# EAGLE board Transceiver (EAGLE 5.06)
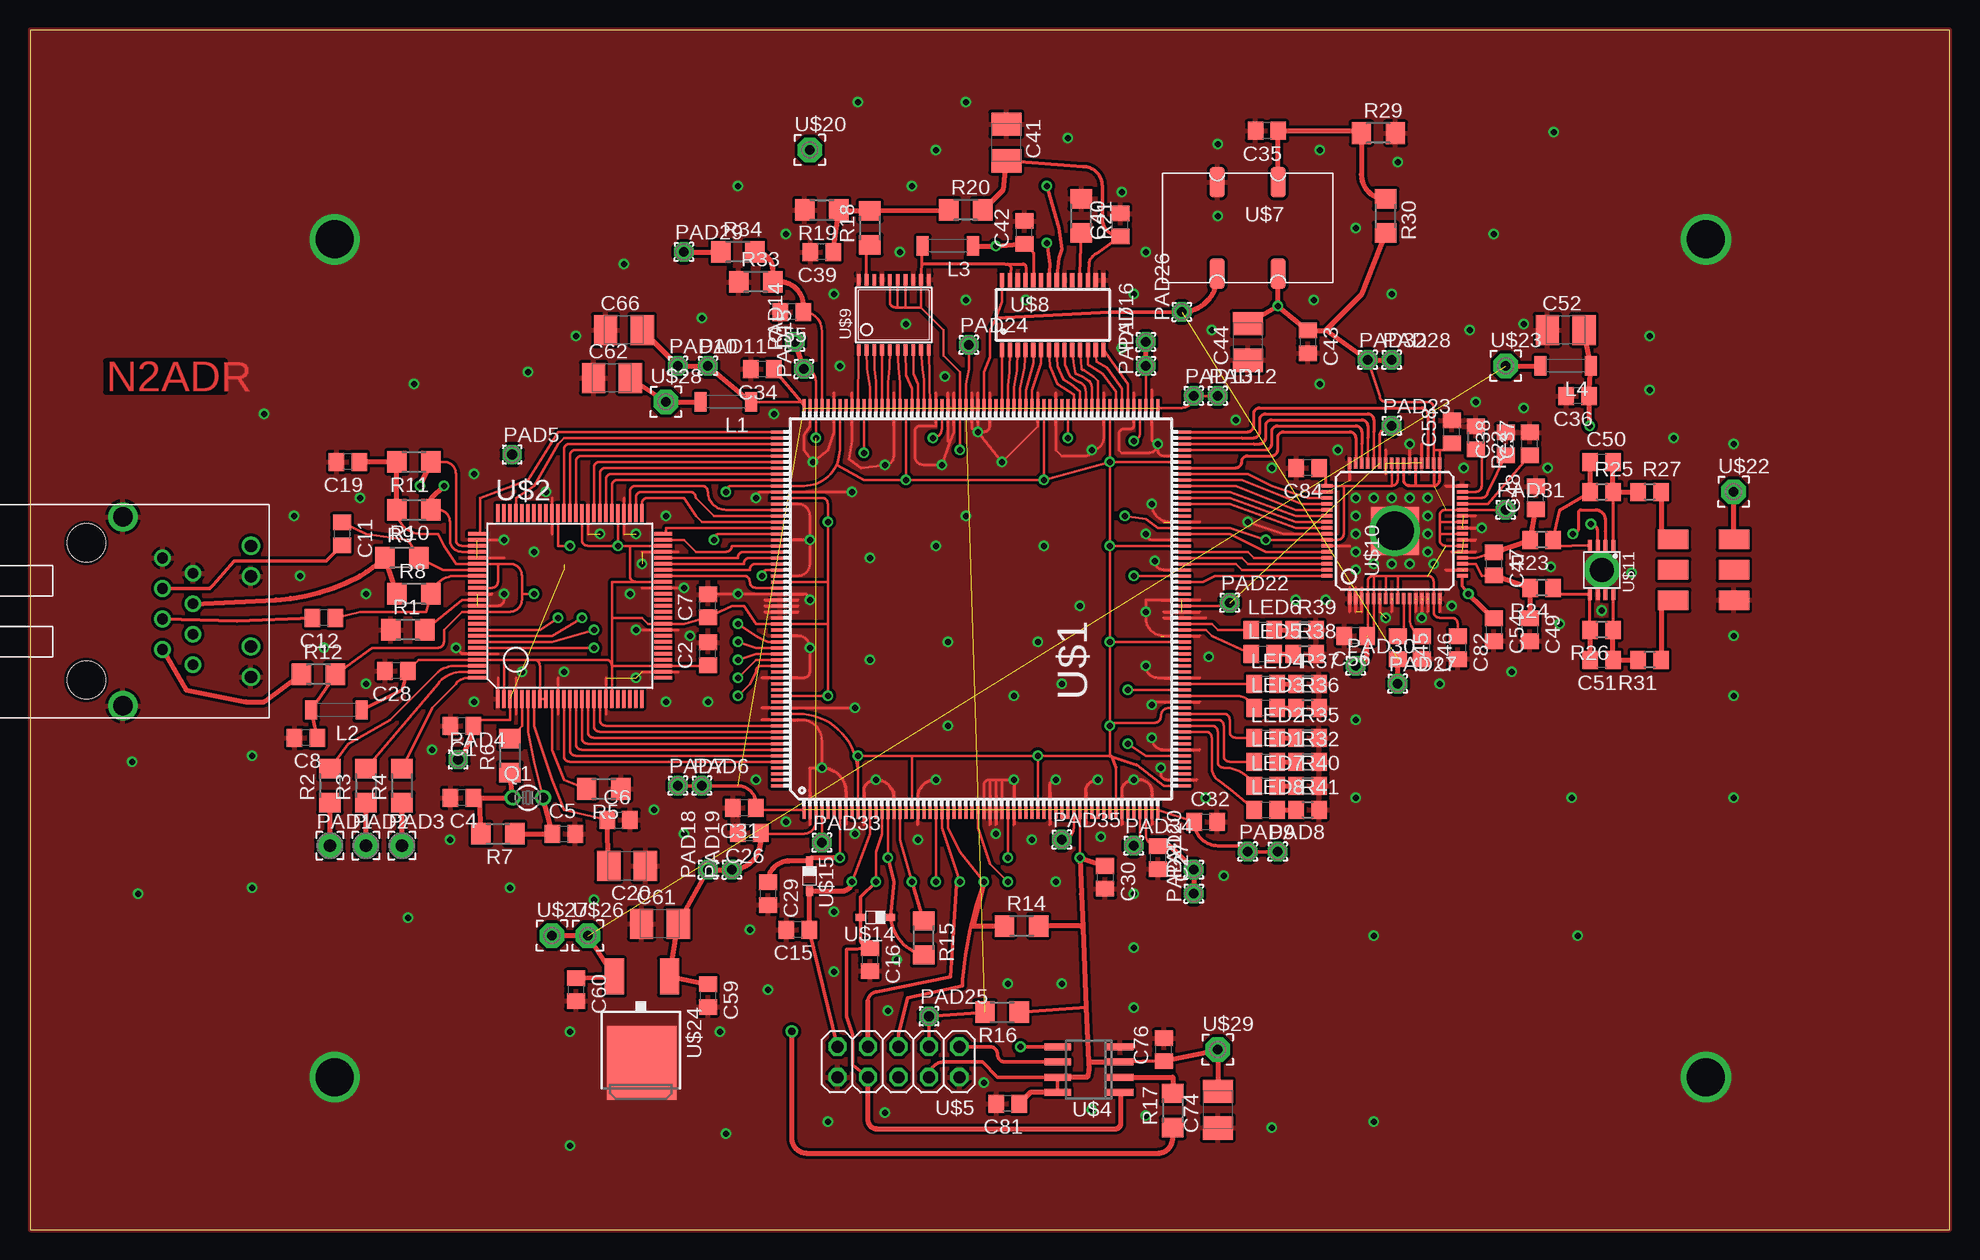
[diagram p0: board, top side]
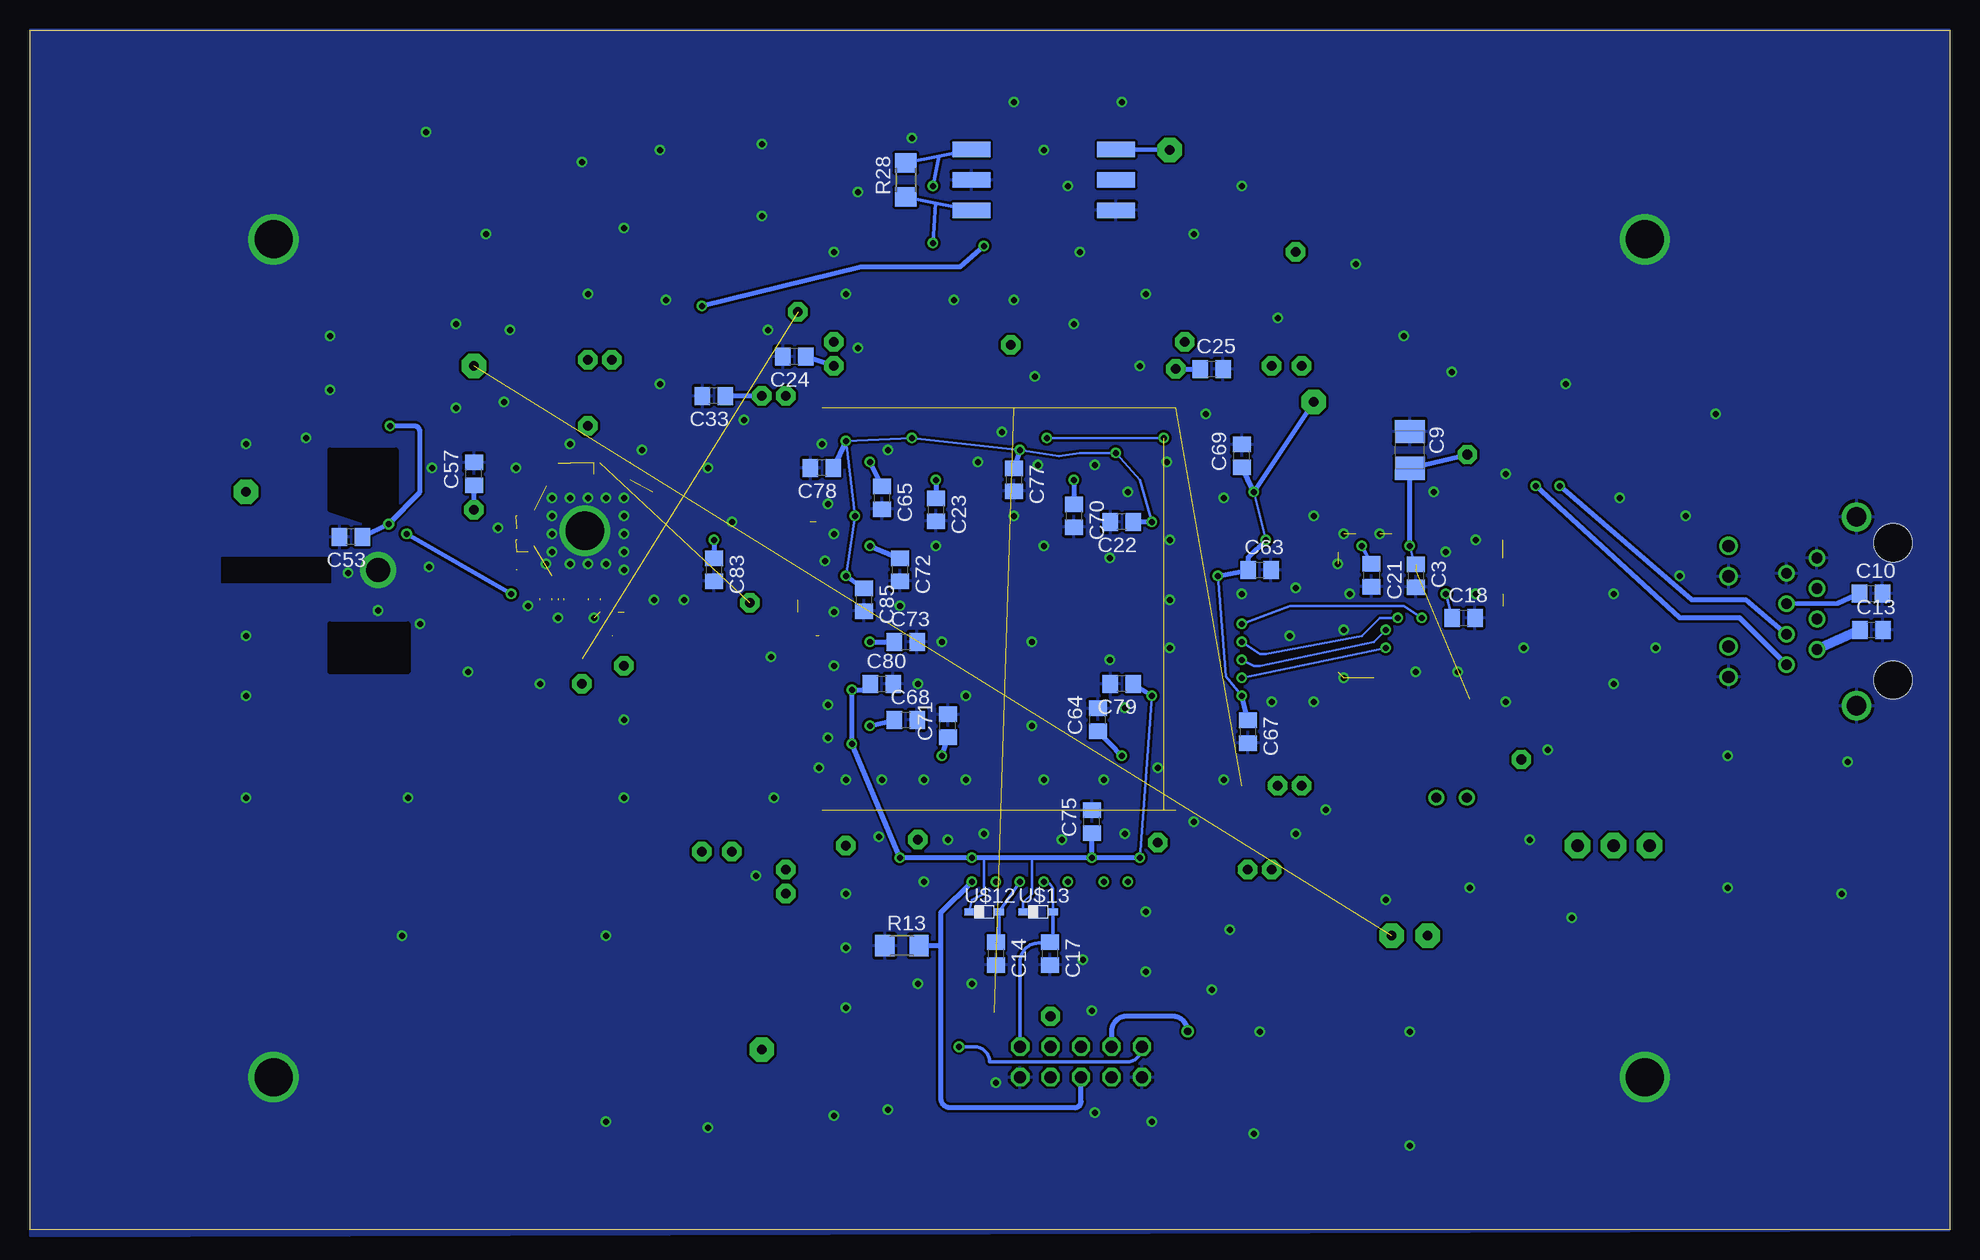
[diagram p1: board, bottom side, seen from below]

Size 160 x 100 mm. Coordinates in mm from the lower left corner, seen from the top.
Outline: 0,0 160,0 160,100 0,100 0,0
Copper layers (1*16): Top 0.035mm / dielectric 1.5mm / Bottom 0.035mm
Design rules "4pcb *": minimum track width 8mil, minimum drill 14mil, track to track 8mil, track to pad 8mil, pad to pad 6mil, via to via 8mil, smd to smd 0mil, copper to edge 0mil, drill to drill 8mil, minimum pad ring 10mil, minimum via ring 8mil, stop-mask expansion 4mil, vias tented up to drill 0mil, thermal gap 10mil
bRestrict: area 128.5,46.5 to 135,50.5; area 129.5,59 to 135,65; area 135,54 to 144,56

## Footprints (pad centres in the part's own frame; a part is rotated, then mirrored left to right if it is on the bottom)
MINI-CD637 = smd 1.651 x 2.54: P$1 -2.54,-2.54; P$2 0,-2.54; P$3 2.54,-2.54; P$4 2.54,2.54; P$5 0,2.54; P$6 -2.54,2.54
C0805 = smd 1.3 x 1.5: 1 -0.95,0; 2 0.95,0
B/3528-21R = smd 1.95 x 2.5: + 1.525,0; - -1.525,0
L4516C = smd 1 x 1.6: 1 -2.1,0; 2 2.1,0
2,15/1,0 = drill 1.016 pad 2.159 octagon: 1 0,0
1,6/0,8 = drill 0.813 pad 1.6 octagon: 1 0,0
TC26V = drill 0.813 round: 1 -1.27,0; 2 1.27,0
R1206 = smd 1.6 x 1.803: 1 -1.422,0; 2 1.422,0
R0805 = smd 1.3 x 1.5: 1 -0.95,0; 2 0.95,0
MINI-KK81 = smd 1.27 x 3.175: P$1 -2.54,6.032; P$2 0,6.032; P$3 2.54,6.032; P$4 2.54,-6.032; P$5 0,-6.032; P$6 -2.54,-6.032
PQFP240 = smd 1.5 x 0.25: 1 -16.75,14.75; 2 -16.75,14.25; 3 -16.75,13.75; 4 -16.75,13.25; 5 -16.75,12.75; 6 -16.75,12.25; 7 -16.75,11.75; 8 -16.75,11.25; 9 -16.75,10.75; 10 -16.75,10.25; 11 -16.75,9.75; 12 -16.75,9.25; 13 -16.75,8.75; 14 -16.75,8.25; 15 -16.75,7.75; 16 -16.75,7.25; 17 -16.75,6.75; 18 -16.75,6.25; 19 -16.75,5.75; 20 -16.75,5.25; 21 -16.75,4.75; 22 -16.75,4.25; 23 -16.75,3.75; 24 -16.75,3.25; 25 -16.75,2.75; 26 -16.75,2.25; 27 -16.75,1.75; 28 -16.75,1.25; 29 -16.75,0.75; 30 -16.75,0.25; 31 -16.75,-0.25; 32 -16.75,-0.75; 33 -16.75,-1.25; 34 -16.75,-1.75; 35 -16.75,-2.25; 36 -16.75,-2.75; 37 -16.75,-3.25; 38 -16.75,-3.75; 39 -16.75,-4.25; 40 -16.75,-4.75; 41 -16.75,-5.25; 42 -16.75,-5.75; 43 -16.75,-6.25; 44 -16.75,-6.75; 45 -16.75,-7.25; 46 -16.75,-7.75; 47 -16.75,-8.25; 48 -16.75,-8.75; 49 -16.75,-9.25; 50 -16.75,-9.75; 51 -16.75,-10.25; 52 -16.75,-10.75; 53 -16.75,-11.25; 54 -16.75,-11.75; 55 -16.75,-12.25; 56 -16.75,-12.75; 57 -16.75,-13.25; 58 -16.75,-13.75; 59 -16.75,-14.25; 60 -16.75,-14.75; 121 16.75,-14.75; 122 16.75,-14.25; 123 16.75,-13.75; 124 16.75,-13.25; 125 16.75,-12.75; 126 16.75,-12.25; 127 16.75,-11.75; 128 16.75,-11.25; 129 16.75,-10.75; 130 16.75,-10.25; 131 16.75,-9.75; 132 16.75,-9.25; 133 16.75,-8.75; 134 16.75,-8.25; 135 16.75,-7.75; 136 16.75,-7.25; 137 16.75,-6.75; 138 16.75,-6.25; 139 16.75,-5.75; 140 16.75,-5.25; 141 16.75,-4.75; 142 16.75,-4.25; 143 16.75,-3.75; 144 16.75,-3.25; 145 16.75,-2.75; 146 16.75,-2.25; 147 16.75,-1.75; 148 16.75,-1.25; 149 16.75,-0.75; 150 16.75,-0.25; 151 16.75,0.25; 152 16.75,0.75; 153 16.75,1.25; 154 16.75,1.75; 155 16.75,2.25; 156 16.75,2.75; 157 16.75,3.25; 158 16.75,3.75; 159 16.75,4.25; 160 16.75,4.75; 161 16.75,5.25; 162 16.75,5.75; 163 16.75,6.25; 164 16.75,6.75; 165 16.75,7.25; 166 16.75,7.75; 167 16.75,8.25; 168 16.75,8.75; 169 16.75,9.25; 170 16.75,9.75; 171 16.75,10.25; 172 16.75,10.75; 173 16.75,11.25; 174 16.75,11.75; 175 16.75,12.25; 176 16.75,12.75; 177 16.75,13.25; 178 16.75,13.75; 179 16.75,14.25; 180 16.75,14.75 | smd 0.25 x 1.5: 61 -14.75,-16.75; 62 -14.25,-16.75; 63 -13.75,-16.75; 64 -13.25,-16.75; 65 -12.75,-16.75; 66 -12.25,-16.75; 67 -11.75,-16.75; 68 -11.25,-16.75; 69 -10.75,-16.75; 70 -10.25,-16.75; 71 -9.75,-16.75; 72 -9.25,-16.75; 73 -8.75,-16.75; 74 -8.25,-16.75; 75 -7.75,-16.75; 76 -7.25,-16.75; 77 -6.75,-16.75; 78 -6.25,-16.75; 79 -5.75,-16.75; 80 -5.25,-16.75; 81 -4.75,-16.75; 82 -4.25,-16.75; 83 -3.75,-16.75; 84 -3.25,-16.75; 85 -2.75,-16.75; 86 -2.25,-16.75; 87 -1.75,-16.75; 88 -1.25,-16.75; 89 -0.75,-16.75; 90 -0.25,-16.75; 91 0.25,-16.75; 92 0.75,-16.75; 93 1.25,-16.75; 94 1.75,-16.75; 95 2.25,-16.75; 96 2.75,-16.75; 97 3.25,-16.75; 98 3.75,-16.75; 99 4.25,-16.75; 100 4.75,-16.75; 101 5.25,-16.75; 102 5.75,-16.75; 103 6.25,-16.75; 104 6.75,-16.75; 105 7.25,-16.75; 106 7.75,-16.75; 107 8.25,-16.75; 108 8.75,-16.75; 109 9.25,-16.75; 110 9.75,-16.75; 111 10.25,-16.75; 112 10.75,-16.75; 113 11.25,-16.75; 114 11.75,-16.75; 115 12.25,-16.75; 116 12.75,-16.75; 117 13.25,-16.75; 118 13.75,-16.75; 119 14.25,-16.75; 120 14.75,-16.75; 181 14.75,16.75; 182 14.25,16.75; 183 13.75,16.75; 184 13.25,16.75; 185 12.75,16.75; 186 12.25,16.75; 187 11.75,16.75; 188 11.25,16.75; 189 10.75,16.75; 190 10.25,16.75; 191 9.75,16.75; 192 9.25,16.75; 193 8.75,16.75; 194 8.25,16.75; 195 7.75,16.75; 196 7.25,16.75; 197 6.75,16.75; 198 6.25,16.75; 199 5.75,16.75; 200 5.25,16.75; 201 4.75,16.75; 202 4.25,16.75; 203 3.75,16.75; 204 3.25,16.75; 205 2.75,16.75; 206 2.25,16.75; 207 1.75,16.75; 208 1.25,16.75; 209 0.75,16.75; 210 0.25,16.75; 211 -0.25,16.75; 212 -0.75,16.75; 213 -1.25,16.75; 214 -1.75,16.75; 215 -2.25,16.75; 216 -2.75,16.75; 217 -3.25,16.75; 218 -3.75,16.75; 219 -4.25,16.75; 220 -4.75,16.75; 221 -5.25,16.75; 222 -5.75,16.75; 223 -6.25,16.75; 224 -6.75,16.75; 225 -7.25,16.75; 226 -7.75,16.75; 227 -8.25,16.75; 228 -8.75,16.75; 229 -9.25,16.75; 230 -9.75,16.75; 231 -10.25,16.75; 232 -10.75,16.75; 233 -11.25,16.75; 234 -11.75,16.75; 235 -12.25,16.75; 236 -12.75,16.75; 237 -13.25,16.75; 238 -13.75,16.75; 239 -14.25,16.75; 240 -14.75,16.75
TQFP100 = smd 0.27 x 1.5: 1 -6,-7.75; 2 -5.5,-7.75; 3 -5,-7.75; 4 -4.5,-7.75; 5 -4,-7.75; 6 -3.5,-7.75; 7 -3,-7.75; 8 -2.5,-7.75; 9 -2,-7.75; 10 -1.5,-7.75; 11 -1,-7.75; 12 -0.5,-7.75; 13 0,-7.75; 14 0.5,-7.75; 15 1,-7.75; 16 1.5,-7.75; 17 2,-7.75; 18 2.5,-7.75; 19 3,-7.75; 20 3.5,-7.75; 21 4,-7.75; 22 4.5,-7.75; 23 5,-7.75; 24 5.5,-7.75; 25 6,-7.75; 51 6,7.75; 52 5.5,7.75; 53 5,7.75; 54 4.5,7.75; 55 4,7.75; 56 3.5,7.75; 57 3,7.75; 58 2.5,7.75; 59 2,7.75; 60 1.5,7.75; 61 1,7.75; 62 0.5,7.75; 63 0,7.75; 64 -0.5,7.75; 65 -1,7.75; 66 -1.5,7.75; 67 -2,7.75; 68 -2.5,7.75; 69 -3,7.75; 70 -3.5,7.75; 71 -4,7.75; 72 -4.5,7.75; 73 -5,7.75; 74 -5.5,7.75; 75 -6,7.75 | smd 1.5 x 0.27: 26 7.75,-6; 27 7.75,-5.5; 28 7.75,-5; 29 7.75,-4.5; 30 7.75,-4; 31 7.75,-3.5; 32 7.75,-3; 33 7.75,-2.5; 34 7.75,-2; 35 7.75,-1.5; 36 7.75,-1; 37 7.75,-0.5; 38 7.75,0; 39 7.75,0.5; 40 7.75,1; 41 7.75,1.5; 42 7.75,2; 43 7.75,2.5; 44 7.75,3; 45 7.75,3.5; 46 7.75,4; 47 7.75,4.5; 48 7.75,5; 49 7.75,5.5; 50 7.75,6; 76 -7.75,6; 77 -7.75,5.5; 78 -7.75,5; 79 -7.75,4.5; 80 -7.75,4; 81 -7.75,3.5; 82 -7.75,3; 83 -7.75,2.5; 84 -7.75,2; 85 -7.75,1.5; 86 -7.75,1; 87 -7.75,0.5; 88 -7.75,0; 89 -7.75,-0.5; 90 -7.75,-1; 91 -7.75,-1.5; 92 -7.75,-2; 93 -7.75,-2.5; 94 -7.75,-3; 95 -7.75,-3.5; 96 -7.75,-4; 97 -7.75,-4.5; 98 -7.75,-5; 99 -7.75,-5.5; 100 -7.75,-6
MAGJACK2 = drill 1.016 round: D1+ 13.716,2.921; D1- 13.716,5.461; D2+ 13.716,-5.461; D2- 13.716,-2.921 | drill 0.889 round: GND 6.35,4.445; PIN7 8.89,3.175; RCT 8.89,0.635; RD+ 6.35,-0.635; RD- 6.35,1.905; TCT 6.35,-3.175; TD+ 8.89,-4.445; TD- 8.89,-1.905 | drill 1.626 round: P$1 3.048,7.874; P$2 3.048,-7.874 | hole 3.175: 0,5.715; 0,-5.715
SOIC-8 = smd 0.6 x 2.2: 1 -1.905,-2.6; 2 -0.635,-2.6; 3 0.635,-2.6; 4 1.905,-2.6; 5 1.905,2.6; 6 0.635,2.6; 7 -0.635,2.6; 8 -1.905,2.6
2X05 = drill 1.016 octagon: 1 -5.08,-1.27; 2 -5.08,1.27; 3 -2.54,-1.27; 4 -2.54,1.27; 5 0,-1.27; 6 0,1.27; 7 2.54,-1.27; 8 2.54,1.27; 9 5.08,-1.27; 10 5.08,1.27
CLOCKSMD2 = smd 1.27 x 2.54: P$1 -2.54,-3.81; P$2 2.54,-3.81; P$3 2.54,3.81; P$4 -2.54,3.81
TSSOP28 = smd 0.35 x 1.2: 1 -4.225,-2.9; 2 -3.575,-2.9; 3 -2.925,-2.9; 4 -2.275,-2.9; 5 -1.625,-2.9; 6 -0.975,-2.9; 7 -0.325,-2.9; 8 0.325,-2.9; 9 0.975,-2.9; 10 1.625,-2.9; 11 2.275,-2.9; 12 2.925,-2.9; 13 3.575,-2.9; 14 4.225,-2.9; 15 4.225,2.9; 16 3.575,2.9; 17 2.925,2.9; 18 2.275,2.9; 19 1.625,2.9; 20 0.975,2.9; 21 0.325,2.9; 22 -0.325,2.9; 23 -0.975,2.9; 24 -1.625,2.9; 25 -2.275,2.9; 26 -2.925,2.9; 27 -3.575,2.9; 28 -4.225,2.9
TSSOP20 = smd 0.305 x 0.991: 1 -2.925,-2.918; 2 -2.275,-2.918; 3 -1.625,-2.918; 4 -0.975,-2.918; 5 -0.325,-2.918; 6 0.325,-2.918; 7 0.975,-2.918; 8 1.625,-2.918; 9 2.275,-2.918; 10 2.925,-2.918; 11 2.925,2.918; 12 2.275,2.918; 13 1.625,2.918; 14 0.975,2.918; 15 0.325,2.918; 16 -0.325,2.918; 17 -0.975,2.918; 18 -1.625,2.918; 19 -2.275,2.918; 20 -2.925,2.918
LQFP64-PPAD = smd 0.9 x 0.3: 1 -5.65,3.75; 2 -5.65,3.25; 3 -5.65,2.75; 4 -5.65,2.25; 5 -5.65,1.75; 6 -5.65,1.25; 7 -5.65,0.75; 8 -5.65,0.25; 9 -5.65,-0.25; 10 -5.65,-0.75; 11 -5.65,-1.25; 12 -5.65,-1.75; 13 -5.65,-2.25; 14 -5.65,-2.75; 15 -5.65,-3.25; 16 -5.65,-3.75; 33 5.65,-3.75; 34 5.65,-3.25; 35 5.65,-2.75; 36 5.65,-2.25; 37 5.65,-1.75; 38 5.65,-1.25; 39 5.65,-0.75; 40 5.65,-0.25; 41 5.65,0.25; 42 5.65,0.75; 43 5.65,1.25; 44 5.65,1.75; 45 5.65,2.25; 46 5.65,2.75; 47 5.65,3.25; 48 5.65,3.75 | smd 0.3 x 0.9: 17 -3.75,-5.65; 18 -3.25,-5.65; 19 -2.75,-5.65; 20 -2.25,-5.65; 21 -1.75,-5.65; 22 -1.25,-5.65; 23 -0.75,-5.65; 24 -0.25,-5.65; 25 0.25,-5.65; 26 0.75,-5.65; 27 1.25,-5.65; 28 1.75,-5.65; 29 2.25,-5.65; 30 2.75,-5.65; 31 3.25,-5.65; 32 3.75,-5.65; 49 3.75,5.65; 50 3.25,5.65; 51 2.75,5.65; 52 2.25,5.65; 53 1.75,5.65; 54 1.25,5.65; 55 0.75,5.65; 56 0.25,5.65; 57 -0.25,5.65; 58 -0.75,5.65; 59 -1.25,5.65; 60 -1.75,5.65; 61 -2.25,5.65; 62 -2.75,5.65; 63 -3.25,5.65; 64 -3.75,5.65 | smd 4 x 4: 65 0,0
MSOP8-PPAD = smd 0.32 x 0.9: 1 -0.975,-2.05; 2 -0.325,-2.05; 3 0.325,-2.05; 4 0.975,-2.05; 5 0.975,2.05; 6 0.325,2.05; 7 -0.325,2.05; 8 -0.975,2.05 | smd 2.06 x 1.83: 9 0,0
SOD323R_INFINEON = smd 0.8 x 0.6: A 1.28,-0.03; C -1.22,-0.03
PAD100 = drill 0.8 pad 2.032 octagon: 1 0,0
DPAK = smd 1.6 x 3: 1 -2.3,-7.1; 3 2.3,-7.1 | smd 5.8 x 6.2: 2 0,0.1

## Placement (x,y rotation side)
ADT4-6T  4:1  [MINI-CD637]  139.5,55 90 top
C1  10n  [C0805]  36,42 180 top
C2  100n  [C0805]  56.5,48 90 top
C3  10n  [C0805]  44.5,54.5 270 bottom
C4  30p  [C0805]  36,36 180 top
C5  30p  [C0805]  44.5,33 0 top
C6  10n  [C0805]  49.06,34.15 0 top
C7  100n  [C0805]  56.5,52 90 top
C8  100n  [C0805]  23,41 180 top
C9  10u  [B/3528-21R]  45,65 270 bottom
C10  10n  [C0805]  6.54,53.03 0 bottom
C11  10n  [C0805]  26,58 270 top
C12  10n  [C0805]  24.5,51 180 top
C13  22n  [C0805]  6.5,50 0 bottom
C14  10p  [C0805]  79.5,23 270 bottom
C15  10p  [C0805]  64,25 180 top
C16  10p  [C0805]  70,22.5 270 top
C17  10p  [C0805]  75,23 270 bottom
C18  100n  [C0805]  40.5,51 0 bottom
C19  100n  [C0805]  26.5,64 180 top
C20  10u  [B/3528-21R]  49.77,30.31 180 top
C21  100n  [C0805]  48.19,54.54 270 bottom
C22  100n  [C0805]  69,59 180 bottom
C23  100n  [C0805]  84.5,60 270 bottom
C24  100n  [C0805]  96.29,72.78 180 bottom
C25  100n  [C0805]  61.5,71.75 0 bottom
C26  100n  [C0805]  59.96,33.07 180 top
C27  100n  [C0805]  94,31 270 top
C28  100n  [C0805]  30.54,46.58 180 top
C29  100n  [C0805]  61.5,28 270 top
C30  100n  [C0805]  89.61,29.37 270 top
C31  100n  [C0805]  59.54,35.16 180 top
C32  100n  [C0805]  98,34 0 top
C33  100n  [C0805]  103,69.5 180 bottom
C34  100n  [C0805]  61.04,71.71 180 top
C35  100n  [C0805]  103.1,91.6 180 top
C36  100n  [C0805]  129,69.5 180 top
C37  1u  [C0805]  125,65.5 90 top
C38  1u  [C0805]  123,65.5 90 top
C39  100n  [C0805]  66,81.5 180 top
C40  100n  [C0805]  90.88,83.75 90 top
C41  10u  [B/3528-21R]  81.38,90.62 270 top
C42  100n  [C0805]  82.88,83.12 90 top
C43  100n  [C0805]  106.5,74 270 top
C44  10u  [B/3528-21R]  101.5,74 90 top
C45  10n  [C0805]  114,48.5 270 top
C46  10n  [C0805]  116,48.5 270 top
C47  15p  [C0805]  122,55.5 270 top
C48  15p  [C0805]  125.5,61 90 top
C49  15p  [C0805]  125,50 270 top
C50  8p  [C0805]  131,64 0 top
C51  8p  [C0805]  131,47.5 180 top
C52  10u  [B/3528-21R]  128,75 0 top
C53  100n  [C0805]  133.25,57.75 180 bottom
C54  100n  [C0805]  122,50 270 top
C55  100n  [C0805]  63.5,76.5 180 top
C56  100n  [C0805]  110.5,49.5 180 top
C57  100n  [C0805]  123,63 90 bottom
C58  100n  [C0805]  118.5,66.5 90 top
C59  1u  [C0805]  56.5,19.5 270 top
C60  1u  [C0805]  45.5,20 270 top
C61  10u  [B/3528-21R]  52.5,25.5 0 top
C62  10u  [B/3528-21R]  48.5,71 0 top
C63  100n  [C0805]  57.5,55 0 bottom
C64  100n  [C0805]  71,42.5 90 bottom
C65  100n  [C0805]  89,61 270 bottom
C66  10u  [B/3528-21R]  49.5,75 0 top
C67  100n  [C0805]  58.5,41.5 270 bottom
C68  100n  [C0805]  87,42.5 0 bottom
C69  100n  [C0805]  59,64.5 90 bottom
C70  100n  [C0805]  73,59.5 270 bottom
C71  100n  [C0805]  83.5,42 90 bottom
C72  100n  [C0805]  87.5,55 270 bottom
C73  100n  [C0805]  87,49 0 bottom
C74  10u  [B/3528-21R]  99,10 90 top
C75  100n  [C0805]  71.5,34 90 bottom
C76  100n  [C0805]  94.5,15 90 top
C77  100n  [C0805]  78,62.5 270 bottom
C78  100n  [C0805]  94,63.5 180 bottom
C79  100n  [C0805]  69,45.5 180 bottom
C80  100n  [C0805]  89,45.5 0 bottom
C81  100n  [C0805]  81.5,10.5 180 top
C82  100n  [C0805]  119,48.5 270 top
C83  100n  [C0805]  103,55 270 bottom
C84  100n  [C0805]  106.5,63.5 180 top
C85  100n  [C0805]  90.5,52.5 270 bottom
L1  [L4516C]  58,69 180 top
L2  [L4516C]  25.54,43.31 180 top
L3  [L4516C]  76.5,82 180 top
L4  [L4516C]  128,72 180 top
LED1  [C0805]  103,39 0 top
LED2  [C0805]  103,41 0 top
LED3  [C0805]  103,43.5 0 top
LED4  [C0805]  103,45.5 0 top
LED5  [C0805]  102.75,48 0 top
LED6  [C0805]  102.75,50 0 top
LED7  [C0805]  103,37 0 top
LED8  [C0805]  103,35 0 top
PAD1  [2,15/1,0]  25,32 0 top
PAD2  [2,15/1,0]  28,32 0 top
PAD3  [2,15/1,0]  31,32 0 top
PAD4  [1,6/0,8]  35.69,39.19 0 top
PAD5  [1,6/0,8]  40.19,64.61 0 top
PAD6  [1,6/0,8]  56,37 0 top
PAD7  [1,6/0,8]  54,37 0 top
PAD8  [1,6/0,8]  104,31.5 0 top
PAD9  [1,6/0,8]  101.5,31.5 0 top
PAD10  [1,6/0,8]  54,72 0 top
PAD11  [1,6/0,8]  56.5,72 0 top
PAD12  [1,6/0,8]  99,69.5 0 top
PAD13  [1,6/0,8]  97,69.5 0 top
PAD14  [1,6/0,8]  63.75,74 90 top
PAD15  [1,6/0,8]  64.5,71.75 90 top
PAD16  [1,6/0,8]  93,74 90 top
PAD17  [1,6/0,8]  93,72 90 top
PAD18  [1,6/0,8]  56.5,30 90 top
PAD19  [1,6/0,8]  58.5,30 90 top
PAD20  [1,6/0,8]  97,30 90 top
PAD21  [1,6/0,8]  97,28 90 top
PAD22  [1,6/0,8]  100,52.25 0 top
PAD23  [1,6/0,8]  113.5,67 0 top
PAD24  [1,6/0,8]  78.25,73.75 0 top
PAD25  [1,6/0,8]  74.93,17.78 0 top
PAD26  [1,6/0,8]  96,76.5 90 top
PAD27  [1,6/0,8]  114,45.5 0 top
PAD28  [1,6/0,8]  113.5,72.5 0 top
PAD29  [1,6/0,8]  54.5,81.5 0 top
PAD30  [1,6/0,8]  110.5,47 0 top
PAD31  [1,6/0,8]  123,60 0 top
PAD32  [1,6/0,8]  111.5,72.5 0 top
PAD33  [1,6/0,8]  66,32.25 0 top
PAD34  [1,6/0,8]  92,32 0 top
PAD35  [1,6/0,8]  86,32.5 0 top
Q1  25 MHz  [TC26V]  41.5,36 0 top
R1  12.4k  [R1206]  31.5,50 0 top
R2  220  [R1206]  25,37 90 top
R3  220  [R1206]  28,37 90 top
R4  220  [R1206]  31,37 90 top
R5  12.0k  [R1206]  47.83,36.73 180 top
R6  10  [R1206]  40,39.5 90 top
R7  1 Meg  [R1206]  39,33 180 top
R8  49.9  [R1206]  32,53 0 top
R9  49.9  [R1206]  31,56 0 top
R10  49.9  [R1206]  32,60 180 top
R11  49.9  [R1206]  32,64 180 top
R12  10  [R1206]  24.04,46.28 0 top
R13  10k  [R1206]  87.32,23.65 0 bottom
R14  10k  [R1206]  82.66,25.3 0 top
R15  10k  [R1206]  74.49,24.31 270 top
R16  10k  [R1206]  81.03,18.12 180 top
R17  25  [R1206]  95.25,9.93 90 top
R18  1800  [R1206]  70,83.5 90 top
R19  1500  [R1206]  66,85 180 top
R20  1000  [R1206]  78,85 0 top
R21  2k  [R1206]  87.62,84.5 270 top
R22  56.2k  [R0805]  120.5,66 270 top
R23  49.9  [R0805]  126,57.5 180 top
R24  49.9  [R0805]  126,53.5 180 top
R25  300  [R0805]  131,61.5 0 top
R26  300  [R0805]  131,50 180 top
R27  100  [R0805]  135,61.5 0 top
R28  180  [R1206]  87,87.5 90 bottom
R29  10k  [R1206]  112.4,91.4 0 top
R30  10k  [R1206]  113,84.5 270 top
R31  100  [R0805]  135,47.5 180 top
R32  220  [R0805]  106.5,39 0 top
R33  2000  [R1206]  60.5,79 0 top
R34  1000  [R1206]  59,81.5 0 top
R35  220  [R0805]  106.5,41 0 top
R36  220  [R0805]  106.5,43.5 0 top
R37  220  [R0805]  106.5,45.5 0 top
R38  220  [R0805]  106.25,48 0 top
R39  220  [R0805]  106.25,50 0 top
R40  220  [R0805]  106.5,37 0 top
R41  220  [R0805]  106.5,35 0 top
T1-1T-KK81  1:1  [MINI-KK81]  75.5,87.5 90 bottom
U$1  EP3C25  [PQFP240]  79.25,51.75 90 top
U$2  LAN9115  [TQFP100]  45,52 0 top
U$3  [MAGJACK2]  4.7,51.53 0 top
U$4  EPCS4  [SOIC-8]  88.27,13.34 90 top
U$5  FPGA-ISP  [2X05]  72.39,13.97 180 top
U$7  CLOCKCVHD  [CLOCKSMD2]  101.5,83.5 180 top
U$8  AD9744  [TSSOP28]  85.25,76.25 0 top
U$9  AD7801  [TSSOP20]  72,76.25 0 top
U$10  ADS5500  [LQFP64-PPAD]  113.75,58.25 90 top
U$11  LTC6405  [MSOP8-PPAD]  131,55 180 top
U$12  DIODE-SH  [SOD323R_INFINEON]  80.5,26.5 0 bottom
U$13  DIODE-SH  [SOD323R_INFINEON]  76,26.5 0 bottom
U$14  DIODE-SH  [SOD323R_INFINEON]  70.5,26 180 top
U$15  DIODE-SH  [SOD323R_INFINEON]  65,29.5 270 top
U$20  PAD1TH86  [PAD100]  65,90 0 top
U$22  PAD1TH86  [PAD100]  142,61.5 0 top
U$23  PAD1TH86  [PAD100]  123,72 0 top
U$24  VREG3DPAK  [DPAK]  51,14 180 top
U$26  PAD1TH86  [PAD100]  46.5,24.5 0 top
U$27  PAD1TH86  [PAD100]  43.5,24.5 0 top
U$28  PAD1TH86  [PAD100]  53,69 0 top
U$29  PAD1TH86  [PAD100]  99,15 0 top

## Library data of the parts
ADT4-6T LED1-LED8 T1-1T-KK81 U$1-U$5 U$7-U$15 U$20 U$22-U$24 U$26-U$29 = Jim
C1-C85 L1-L4 R1-R41 = rcl
PAD1-PAD35 = wirepad
Q1 = crystal

## Nets
+1.2V: C23.1 C62.+ C63.1 C64.1 C65.1 C67.1 C68.1 C69.1 C70.1 C71.1 C72.1 C73.1 L1.2 U$1.10 U$1.19 U$1.40 U$1.53 U$1.61 U$1.74 U$1.85 U$1.101 U$1.115 U$1.129 U$1.140 U$1.163 U$1.174 U$1.190 U$1.198 U$1.204 U$1.220 U$1.228 U$28.1
+2.5V: C24.1 C25.1 C26.1 C27.1 C59.1 C61.+ PAD14.1 PAD15.1 PAD16.1 PAD17.1 PAD18.1 PAD19.1 PAD20.1 PAD21.1 U$1.3 U$1.58 U$1.123 U$1.157 U$1.178 U$24.1
+3.3V: C2.1 C7.1 C21.1 C22.1 C28.1 C29.1 C30.1 C74.+ C75.1 C76.1 C77.1 C78.1 C79.1 C80.1 C81.1 C83.1 C84.1 C85.1 L2.1 L3.2 R14.2 R15.2 R16.1 U$1.7 U$1.15 U$1.35 U$1.47 U$1.66 U$1.77 U$1.96 U$1.104 U$1.124 U$1.136 U$1.154 U$1.170 U$1.192 U$1.206 U$1.213 U$1.225 U$2.2 U$2.8 U$2.9 U$2.20 U$2.28 U$2.35 U$2.42 U$2.48 U$2.55 U$2.61 U$2.97 U$4.3 U$4.7 U$4.8 U$5.4 U$8.25 U$8.27 U$9.12 U$9.14 U$9.15 U$9.16 U$10.40 U$10.41 U$10.49 U$10.58 U$12.C U$13.C U$14.C U$15.C U$29.1
+5.0V: C60.1 L4.2 U$23.1 U$24.3 U$26.1 U$27.1
AVCC: C42.1 C43.1 C44.+ C56.1 C57.1 C58.1 C82.1 L3.1 PAD28.1 PAD30.1 PAD31.1 PAD32.1 R30.2 U$7.P$4 U$8.24 U$10.4 U$10.5 U$10.7 U$10.9 U$10.15 U$10.22 U$10.24 U$10.26 U$10.28 U$10.33 U$10.34 U$10.37 U$10.39
GND: ADT4-6T.P$1 C1.2 C2.2 C3.2 C4.2 C5.2 C6.2 C7.2 C8.2 C9.- C10.2 C13.2 C14.2 C15.2 C16.2 C17.2 C18.2 C19.2 C20.- C21.2 C22.2 C23.2 C24.2 C25.2 C26.2 C27.2 C28.2 C29.2 C30.2 C31.2 C32.2 C33.2 C34.2 C35.2 C36.2 C37.2 C38.2 C39.2 C40.2 C41.- C42.2 C43.2 C44.- C46.2 C48.2 C49.2 C52.- C53.2 C54.2 C55.2 C56.2 C57.2 C58.2 C59.2 C60.2 C61.- C62.- C63.2 C64.2 C65.2 C66.- C67.2 C68.2 C69.2 C70.2 C71.2 C72.2 C73.2 C74.- C75.2 C76.2 C77.2 C78.2 C79.2 C80.2 C81.2 C82.2 C83.2 C84.2 C85.2 R1.1 R5.1 R13.1 R19.2 R21.1 R22.1 R29.2 R32.2 R33.1 R35.2 R36.2 R37.2 R38.2 R39.2 R40.2 R41.2 T1-1T-KK81.P$2 T1-1T-KK81.P$6 U$1.2 U$1.8 U$1.11 U$1.16 U$1.20 U$1.31 U$1.32 U$1.33 U$1.34 U$1.36 U$1.42 U$1.48 U$1.54 U$1.59 U$1.62 U$1.67 U$1.75 U$1.79 U$1.86 U$1.89 U$1.90 U$1.92 U$1.97 U$1.102 U$1.105 U$1.116 U$1.122 U$1.125 U$1.130 U$1.138 U$1.141 U$1.149 U$1.151 U$1.152 U$1.155 U$1.156 U$1.158 U$1.165 U$1.172 U$1.175 U$1.179 U$1.191 U$1.193 U$1.199 U$1.205 U$1.208 U$1.209 U$1.210 U$1.211 U$1.212 U$1.215 U$1.222 U$1.227 U$1.229 U$2.1 U$2.4 U$2.11 U$2.19 U$2.27 U$2.34 U$2.41 U$2.47 U$2.54 U$2.60 U$2.66 U$2.77 U$2.80 U$2.86 U$2.88 U$2.96 U$3.D1+ U$3.D2+ U$3.GND U$3.P$1 U$3.P$2 U$3.PIN7 U$4.4 U$5.2 U$5.10 U$7.P$2 U$8.15 U$8.16 U$8.20 U$8.26 U$9.11 U$9.13 U$9.17 U$9.20 U$10.1 U$10.2 U$10.3 U$10.6 U$10.8 U$10.12 U$10.13 U$10.14 U$10.16 U$10.18 U$10.21 U$10.23 U$10.25 U$10.27 U$10.32 U$10.36 U$10.38 U$10.42 U$10.48 U$10.50 U$10.57 U$10.59 U$10.65 U$11.6 U$11.9 U$24.2
N$1: C8.1 C18.1 C19.1 L2.2 R10.2 R11.2 R12.2 U$2.81 U$2.85 U$2.89
N$2: C1.1 C3.1 C9.+ PAD4.1 PAD5.1 U$2.3 U$2.65
N$3: C4.1 Q1.1 R6.1 R7.2
N$4: U$1.183 U$2.64
N$5: R6.2 U$2.5
N$6: C5.1 Q1.2 R7.1 U$2.6
N$7: C6.1 C20.+ U$2.7
N$8: R5.2 U$2.10
N$9: R4.2 U$2.100
N$10: R3.2 U$2.99
N$11: R2.2 U$2.98
N$12: R1.2 U$2.87
N$13: U$1.230 U$2.18
N$14: U$1.231 U$2.17
N$15: U$1.232 U$2.16
N$16: U$1.233 U$2.15
N$17: U$1.234 U$2.14
N$18: U$1.235 U$2.13
N$19: U$1.236 U$2.12
N$20: U$1.207 U$2.43
N$21: U$1.203 U$2.44
N$22: U$1.202 U$2.45
N$23: U$1.201 U$2.46
N$24: U$1.200 U$2.49
N$25: U$1.197 U$2.50
N$26: U$1.196 U$2.51
N$27: U$1.195 U$2.52
N$28: U$1.194 U$2.53
N$29: U$1.189 U$2.56
N$30: U$1.188 U$2.57
N$31: U$1.187 U$2.58
N$32: U$1.186 U$2.59
N$33: U$1.185 U$2.62
N$34: U$1.184 U$2.63
N$35: R18.1 U$9.19
N$36: U$1.182 U$2.72
N$37: U$1.181 U$2.76
N$38: U$1.216 U$2.92
N$39: U$1.217 U$2.93
N$40: U$1.218 U$2.94
N$41: U$1.219 U$2.95
N$42: C10.1 R8.1 R9.1 U$3.RCT
N$43: C12.1 R8.2 U$2.83
N$44: C11.1 R9.2 U$2.82
N$45: C13.1 R12.1 U$3.TCT
N$46: R11.1 U$2.78 U$3.TD-
N$47: R10.1 U$2.79 U$3.TD+
N$48: U$1.113 U$10.51
N$49: C45.2 PAD26.1 PAD27.1 U$1.150 U$7.P$3 U$8.28
N$50: R14.1 U$1.25 U$5.5
N$51: C17.1 U$1.23 U$4.6 U$5.1 U$13.A
N$52: C14.1 R17.1 U$1.24 U$5.7 U$12.A
N$53: C16.1 U$1.14 U$4.1 U$5.8 U$14.A
N$54: C15.1 U$1.12 U$4.5 U$5.9 U$15.A
N$55: U$1.126 U$8.14
N$56: PAD24.1 PAD25.1 R16.2 U$1.153 U$5.3
N$57: R15.1 U$1.17
N$58: PAD1.1 R2.1
N$59: PAD2.1 R3.1
N$60: PAD3.1 R4.1
N$61: R13.2 U$1.30 U$5.6
N$62: U$1.127 U$8.13
N$63: U$1.128 U$8.12
N$64: C11.2 U$3.RD-
N$65: C12.2 U$3.RD+
N$66: U$1.131 U$8.11
N$67: U$1.132 U$8.10
N$68: U$1.133 U$8.9
N$69: U$1.134 U$8.8
N$70: U$1.135 U$8.7
N$71: U$1.142 U$8.6
N$72: U$1.143 U$8.5
N$73: U$1.144 U$8.4
N$74: U$1.145 U$8.3
N$75: U$1.146 U$8.2
N$76: U$1.147 U$8.1
N$77: U$1.171 U$9.1
N$78: U$1.169 U$9.2
N$79: U$1.168 U$9.3
N$80: U$1.167 U$9.4
N$81: U$1.159 U$9.10
N$82: U$1.160 U$9.9
N$83: U$1.161 U$9.8
N$84: U$1.162 U$9.7
N$85: U$1.164 U$9.6
N$86: U$1.166 U$9.5
N$87: R17.2 U$4.2
N$88: C39.1 R18.2 R19.1 R20.1
N$89: C40.1 C41.+ R20.2 U$8.17
N$90: R28.2 T1-1T-KK81.P$3 U$8.21
N$91: R21.2 U$8.18
N$93: U$1.120 U$10.35
N$94: PAD22.1 PAD23.1 U$1.91 U$10.43
N$95: U$1.119 U$10.44
N$96: U$1.118 U$10.45
N$97: C55.1 R33.2 R34.2 U$1.177
N$98: PAD33.1 U$1.4
N$99: PAD34.1 U$1.57
N$100: PAD35.1 U$1.46
N$101: PAD29.1 R34.1
N$102: U$1.117 U$10.46
N$103: LED6.1 U$1.88
N$104: LED6.2 R39.1
N$105: LED5.1 U$1.87
N$106: LED5.2 R38.1
N$107: LED4.1 U$1.78
N$108: U$1.114 U$10.47
N$109: U$1.112 U$10.52
N$110: U$1.111 U$10.53
N$111: U$1.110 U$10.54
N$112: U$1.109 U$10.55
N$113: U$1.108 U$10.56
N$114: U$1.103 U$10.60
N$115: U$1.100 U$10.61
N$116: R22.2 U$10.31
N$117: R28.1 T1-1T-KK81.P$1 U$8.22
N$118: U$1.99 U$10.62
N$119: ADT4-6T.P$3 U$22.1
N$120: C36.1 C52.+ C53.1 L4.1 U$11.3
N$121: C35.1 R29.1 R30.1 U$7.P$1
N$122: T1-1T-KK81.P$4 U$20.1
N$123: C54.1 U$10.17 U$11.2
N$124: LED4.2 R37.1
N$125: LED3.2 R36.1
N$126: U$1.98 U$10.63
N$127: U$1.95 U$10.64
N$128: LED3.1 U$1.76
N$129: C38.1 U$10.30
N$130: LED2.1 U$1.73
N$131: C37.1 U$10.29
N$132: C46.1 U$10.11
N$133: C45.1 U$10.10
N$134: C47.2 C49.1 R24.2 U$10.19
N$135: C50.2 R25.2 R27.1 U$11.1
N$136: C50.1 R23.1 R25.1 U$11.4
N$137: C47.1 C48.1 R23.2 U$10.20
N$138: C51.1 R26.1 R31.2 U$11.8
N$139: C51.2 R24.1 R26.2 U$11.5
N$140: ADT4-6T.P$6 R31.1
N$141: ADT4-6T.P$4 R27.2
N$142: LED2.2 R35.1
N$143: LED1.1 U$1.72
N$144: LED1.2 R32.1
N$145: LED7.1 U$1.71
N$146: LED7.2 R40.1
N$147: LED8.1 U$1.70
N$148: LED8.2 R41.1
VCCD_PLL: C31.1 C32.1 C33.1 C34.1 C66.+ L1.1 PAD6.1 PAD7.1 PAD8.1 PAD9.1 PAD10.1 PAD11.1 PAD12.1 PAD13.1 U$1.1 U$1.60 U$1.121 U$1.180

## Tracks (layer width: path | path; a pad name or v marks a point on that pad's centre or on a via)
+1.2V  (via drill 0.5)
  Top 0.22: U$1.198 57.5,58 arc90 v57,57.5 | U$1.204 61.5,55 arc90 v61,54.5 | U$1.220 61,47 arc90 60.5,46.5 60,45.5 v59,44.5 | U$1.228 64,43 arc-90 69,38 | 69,38 U$1.10 | 90.5,38.5 U$1.53 | v84,39.5 U$1.40 | 73.5,39.5 v69,39.5 69,38 | v84,39.5 73.5,39.5 | 73.5,39.5 U$1.19 | 67.5,65 arc-90 64.5,62 U$1.190 58.5,62 arc90 v58,61.5 | 67.5,65 U$1.174 | v90,64 U$1.129 | v90,64 U$1.115 | v84.5,62.5 U$1.140 | v73,62.5 v84.5,62.5 | v73,62.5 U$1.163 | v84.5,62.5 v90,64 | v90,64 v90,57 | v90,57 v90,49 | 90,42.25 v90,42 90,39.5 v84,39.5 | v90,49 90,42.25 | v90,49 U$1.85 | v90,57 U$1.101 | U$1.61 94.5,37 92.25,38.75 | v73,62.5 69.5,62.5 67.25,63.75 67.5,65 | U$1.74 95,43.5 arc90 94.25,42.75 arc-90 93.75,42.25 90,42.25
  Top 0.25: 90,39.5 90.15,39.45 | 90.15,39.45 92.25,38.75 | 90.15,39.45 90.5,38.5
  Top 0.406: C62.+ U$28.1 L1.2
  Bottom 0.22: v57,57.5 v58,61.5 | v61,54.5 60.3,46.1 v59,44.5
  Bottom 0.406: U$28.1 v58,61.5 C69.1 | C67.1 v59,44.5 | v73,62.5 C70.1 | v69,39.5 C64.1 | v84,39.5 C71.1 | v90,42 C68.1 | v90,49 C73.1 | v90,57 C72.1 | v90,64 C65.1 | v84.5,62.5 C23.1 | v61,54.5 C63.1 58.45,56.05 v57,57.5
+2.5V  (via drill 0.5)  (3 unrouted)
  Top 0.22: U$1.58 93,32.95 arc90 C27.1 | U$1.3 65.5,34 arc-90 64.5,33 60.98,33 arc-90 C26.1 | v65.5,66 U$1.178 65.5,70.75 arc90 PAD15.1 | U$1.157 76,66.75 arc-90 v75.25,66 | U$1.123 PAD17.1
  Top 0.406: C27.1 95.05,31.95 PAD20.1 PAD21.1 | C26.1 60.91,32.41 arc-90 PAD19.1 PAD18.1 C61.+ U$24.1 C59.1 | PAD15.1 PAD14.1 | PAD17.1 PAD16.1
  Bottom 0.22: v65.5,66 v75.25,66
  Bottom 0.406: PAD17.1 C24.1 | PAD15.1 C25.1
+3.3V  (via drill 0.5, 0.5 pad 0.5)
  Top 0.22: C2.1 56.5,47 U$2.28 48.5,47 | 39.5,47.5 U$2.97 32.41,47.5 C28.1 | 39.5,47.5 42,47.5 | 42,47.5 arc-90 42.5,47 U$2.8 U$2.9 | 39.5,47.5 U$2.2 | 48.5,47 U$2.20 | 48.5,47 arc90 48,47.5 42,47.5 | U$2.61 46,57.5 arc90 46.5,57 48.5,57 | 48.5,57 arc90 49,57.5 U$2.55 | 50,57 v49,57 48.5,57 | 50,57 U$2.48 | 50.5,54 U$2.42 | 50.5,54 arc-90 50,54.5 50,57 | 66,44.5 U$1.225 | 66,44.5 arc90 66.5,45 66.5,50.5 | 66.5,50.5 U$1.213 60.5,50.5 59.5,52 58.5,52 C7.1 54.5,50.5 U$2.35 51.5,50.5 51,51 48.5,51 | U$1.192 66,61 arc-90 66.5,60.5 v66.5,59 66.5,54 | 66.5,50.5 66.5,54 | 66.5,54 U$1.206 | v71.5,31 U$1.15 | v87.5,31 U$1.47 | v81.5,31 U$1.35 | v67.5,31 U$1.7 | v69.5,64.75 U$1.170 | U$1.124 92.5,66.5 arc-90 v92,65.75 | v77.5,65 U$1.154 77.5,71.5 76.12,72.88 76.12,75 74.25,76.88 | v86.5,66 U$1.136 | 66,44.5 v66.5,44.5 | 48.5,47 48.5,51 | 48.5,51 48.5,54 50.5,54 | v92,54.5 U$1.96 | v91.25,59.5 93,59.25 94,58.5 U$1.104 100,58.5 v103,57.5 U$10.58 109,57.5 arc90 109.5,58 109.5,62 | 74.25,76.88 74.25,79.14 U$9.12 | U$9.16 71.67,77.33 arc90 72.12,76.88 72.25,76.88 | 74.25,76.88 73,76.88 | 73,76.88 72.25,76.88 | U$9.15 72.33,76.95 arc-90 72.25,76.88 | U$9.14 72.97,76.9 arc90 73,76.88 | 109,62 U$10.49 109.5,62 | U$10.40 114,62.5 arc-90 113.5,62 | 109.5,62 113.5,62 | 113.5,62 U$10.41 | v91.5,40.5 93,39.5 U$1.66 | v91.5,45 U$1.77
  Top 0.25: U$9.12 74.33,80.51 | 74.33,80.51 L3.2 | U$8.27 81.75,80.25 81.5,80.5 81.25,80.5 | 81.25,80.5 81.24,80.51 74.33,80.51 | U$8.25 83,79.17 83,80.25 arc90 82.75,80.5 81.25,80.5 | U$10.49 arc-90 108,62.1 108,63.5 arc180 C84.1
  Top 0.3: v71.5,31 72,29 U$14.C arc72 R15.2 | U$4.8 U$4.7 80.64,12.7 79.38,13.97 76.2,13.97 arc90 U$5.4 | 88.04,18.5 R16.1 | L2.1 31,45 C28.1
  Top 0.305: U$4.3 C76.1
  Top 0.406: C29.1 arc-90 63.27,30.72 U$15.C arc-90 65.25,31 v67.5,31 | 88.24,13.96 88.27,13.34 88.14,12.7 U$4.7 | 88.24,13.96 88.04,18.5 87.75,25.16 | 87.75,25.16 87.63,27.95 v87.5,31 C30.1 | 88.24,13.96 U$4.3 | R14.2 87.61,25.3 87.75,25.16 | C76.1 U$29.1 C74.+ | C81.1 83.38,11.43 U$4.8
  Bottom 0.22: U$13.C 77.22,27.28 76.5,28 76.5,31 | U$12.C 81.5,27.5 80.5,28 80.5,31 | v66.5,59 67.5,62.5 v69.5,64.75 72.5,64.75 74.25,64.5 v77.5,65 v86.5,66 v92,65.75 v91.25,59.5 v92,54.5 | v66.5,44.5 v67.5,31
  Bottom 0.3: v49,57 C21.1
  Bottom 0.406: v67.5,31 v71.5,31 | v71.5,31 76.5,31 80.5,31 v81.5,31 v87.5,31 v91.5,40.5 v91.5,45 90.45,45 C80.1 | v66.5,59 C22.1 | v71.5,31 C75.1 | v66.5,44.5 C79.1 | v77.5,65 C77.1 | v92,65.75 C78.1 | v92,54.5 C85.1 | v103,57.5 C83.1
+5.0V  (1 unrouted)
  Top 0.406: U$23.1 L4.2 | C60.1 U$24.3 U$26.1 U$27.1
AVCC  (via drill 0.5)  (3 unrouted)
  Top 0.22: U$10.4 111.5,54 arc-90 112,54.5 | 112,54.5 113,54.5 | 113,54.5 113.5,54.5 | 112,54.5 U$10.5 112,49.5 111.5,49.5 111.5,52.5 | 113,54.5 U$10.7 | 117.5,58 117.5,57.5 arc90 118,57 U$10.22 | 117.5,58 117.5,59 | 117.5,59 117.5,59.5 arc-90 118,60 U$10.28 PAD31.1 | 117.5,59 U$10.26 | 117.5,58 U$10.24 | 117,65 117,68.5 arc90 116.5,69 113,69 arc-90 112.5,69.5 PAD32.1 | 117,65 U$10.34 | 113,54.5 114,54.5 | 114,54.5 116.5,54.5 arc-90 117,54 U$10.15 117,51.5 arc90 117.5,51 118.5,51 arc-90 119,50.5 C82.1 | 114,54.5 U$10.9 | 117,65 117.5,65 | 117.5,65 117.5,64 | 117.5,65 118.5,65 C58.1
  Top 0.25: U$8.24 83.62,81.42 C42.1 | U$10.39 114.5,62.5 arc90 115,62 115.5,62 | 117,62 115.5,62 | 117,62 arc90 117.5,62.5 U$10.33 | 115.5,62 U$10.37 | U$10.34 117,62
  Top 0.406: L3.1 v80.5,82 C42.1 | 104.04,77 v104,77 C44.+ | 104.04,77 U$7.P$4 | 104.04,77 C43.1 107.95,74.95 108,75 | 108,75 111,78 R30.2 | 108,75 PAD32.1 PAD28.1 | C56.1 111.45,47.95 arc-90 PAD30.1
  Bottom 0.406: PAD31.1 C57.1 | v104,77 90.75,80.25 82.5,80.25 v80.5,82
GND  (via drill 0.5, 0.5 pad 0.22, 0.5 pad 0.5, 0.5 pad 0.6, 2 pad 0.81, 3.17, 3.17 pad 0.81)  (30 unrouted)
  Top 0.22: U$2.88 39,52 arc90 39.5,52.5 v39.5,53 | U$2.77 v39.5,57.5 | U$2.80 39.5,56 | U$2.96 39,48 | U$2.1 39,46 | 40.5,46 U$2.4 40.5,43 | 44,46 U$2.11 44,43 | 48,46 U$2.19 48,43 | 54,50 U$2.34 51,50 | 54,46.5 U$2.27 51,46.5 | 54,53.5 U$2.41 51,53.5 | 54,56.5 U$2.47 51,56.5 | 49.5,61 U$2.54 49.5,58 | 46.5,60 U$2.60 46.5,58 | 43.5,61 U$2.66 43.5,58 | U$1.208 56.55,53 C7.2 | 64,60.5 arc-90 65,59.5 v65,57.5 65,55.5 arc-90 64,54.5 U$1.205 | 64.5,53 arc-90 v65,52.5 | 64,49.5 arc-90 v65,48.5 65,46.5 arc-90 64.5,46 64,46 U$1.222 | v68.5,61.5 U$1.191 61,61.5 arc90 v60.5,61 | U$1.122 93.5,67 93.5,66 arc90 v94,65.5 | U$1.116 94.5,64.5 arc-90 94,65 v94,65.5 | U$1.105 95,59 arc-90 v93.5,60.5 | U$1.97 94.5,55 arc-90 v93.75,55.75 | U$1.92 94.25,52.5 93,52.5 v93,51.5 93,51 arc90 94.5,49.5 U$1.86 | v93,47 arc90 94,46 94.5,46 U$1.79 | U$1.75 94.5,44 93.75,44 arc90 v93.5,43.75 | U$1.62 94.75,37.5 arc-90 94.25,38 v94.25,38.5 | U$1.67 94.5,40 arc-90 v93.5,41 | U$1.102 93.5,57.5 arc-90 v93,58 | U$1.130 89.5,67 89.5,66 arc-90 v88.5,65 arc-90 88,64.5 86,64.5 85.5,65 85.5,67 U$1.138 | v79,66.5 79,67.25 U$1.151 | v79,66.5 v81,64 84,67 84,67.25 U$1.141 | U$1.152 78.5,67.25 78.5,67 arc90 v79,66.5 | U$1.149 80,67 arc-90 79.5,66.5 v79,66.5 | U$1.125 92,67.25 92,67 arc-90 91.75,66.75 91.25,66.75 arc90 90.75,66.25 90.75,65 91,64.75 93.25,64.75 arc90 v94,65.5 | U$1.155 77,67 77,66.5 76.7,65.68 | 76.7,65.68 v76,63.75 74.5,63.75 arc-90 73.75,64.5 73.75,66.5 arc-90 74.25,67 75.5,67 75.5,67.25 U$1.158 | U$1.156 76.5,67 76.5,65.75 76.7,65.68 | U$1.165 72,67 72,64.5 arc-90 v71.25,63.75 69.25,63.5 68.25,64.25 68.5,65.75 68.5,67 U$1.172 | U$1.175 67,67.25 67,66.5 66.5,65 v65.25,64 64.5,65 64.5,66.25 65,67 U$1.179
  Top 0.22: U$1.227 v68.75,43.5 | U$1.229 64.25,42.5 arc-90 66,40.75 v66,38.5 | U$1.31 79.5,37 arc-90 80,37.5 | 80.5,37.5 80,37.5 | 81,37.5 80.5,37.5 | 81,37.5 v82,37.5 | 80,37.5 80,36.25 U$1.32 | 80.5,37.5 80.5,36.25 U$1.33 | U$1.34 81,37.5 | U$10.57 104.5,58 v101.5,59 | U$10.59 110,57
  Top 0.25: 64,60.5 U$1.193 | v65,57.5 U$1.199 | U$1.208 64.5,53 | 64,49.5 U$1.215 | 64,46 61,46 | 61,43.5 U$1.227 64,43.5 | 61,42.5 U$1.229 64,42.5 | U$1.2 65,36.5 | 65,36.5 65,38.5 v66,38.5 arc-90 68,36.5 | 68,36.5 U$1.8 | U$1.11 69.5,36.5 | 69.5,36.5 arc-90 v70.5,37.5 arc-90 72,36 U$1.16 | U$1.20 74,36 arc-90 v75.5,37.5 | 82,36.5 U$1.36 | v82,37.5 82,36.5 | U$1.42 85,36.5 | 85,36.5 85,37 arc-90 v85.5,37.5 | U$1.48 88,36.5 | 88,36.5 arc-90 v89,37.5 | U$1.54 91,36.25 | 91,36.25 91,36.5 arc-90 v92,37.5 92.5,37.5 arc-90 93.5,36.5 93.5,36.25 | 93.5,36.25 U$1.59 | 65,36.5 65,33.75 | 68,36.5 68,33.75 | 69.5,36.5 69.5,33.75 | 72,34.5 72,36.5 | 74,33.75 74,36.25 | 82,36.5 82,33.75 | 85,36.5 85,33.75 | 88,36.5 88,33.75 | 91,36.25 91,33.75 | 93.5,36.25 93.5,33.75 | U$2.96 36,48 v35.5,48.5 | 61.25,52.5 64,52.5 | 61.25,52 64,52 | 61.25,51.5 64,51.5 | 67,67.25 67,69.75 | 68.5,67 68.5,69.75 | 72,67 72,69.75 | 75.5,67.25 75.5,69.75 | 76.5,67 76.5,69.75 | 77,67 77,69.75 | 78.5,67.25 78.5,69.75 | 79,67.25 79,69.75 | 80,67 80,69.75 | 84,67.25 84,69.75 | 85.5,67 85.5,69.75 | 89.5,67 89.5,69.75 | 92,67.25 92,69.75 | 93.5,67 93.5,70 | 94.5,59 97.5,59 | 94.5,55 96.5,55 | 94.25,52.5 97.5,52.5 | 94.25,49.5 97.5,49.5 | 94.5,46 97.5,46 | 94.5,44 97.5,44 | 94.25,40 97.5,40 | 94.75,37.5 97.25,37.5 | 80,36.25 80,33.75 | 80.5,36.25 80.5,33.75 | 113,63 113,65 | 110,62.5 110,64 | 94.5,51.5 97.5,51.5 | 94.5,51 98,51 | U$10.50 107,61.5 | 115,65 v115,65.5 U$10.38 | U$10.36 116,65.5 | 118,55 119.5,55 | 119.5,58.5 120.5,58.5 | 119.5,57.5 120.5,57.5 | 118,62 119.5,62 | 115.5,52.5 115.5,51.5 | 116,52.5 116,51.5 | 116.5,52.5 116.5,51.5 | 117.5,52.5 117.5,51.5 | 110,51.5 110,53.5 | 110.5,51.5 110.5,53.5 | 111,51.5 111,53.5 | 112.5,52.5 112.5,51.5 | 113.5,52.5 113.5,51.5
  Top 0.25: 118.5,56.5 120.5,56.5 | 120.5,59.5 119.5,59.5 | U$11.6 130.7,54.3
  Top 0.254: U$2.86 38.5,53
  other vias: 59,53 81.5,20.5 63,34 67,21.5 67,26.5 80.5,33 41,46.5 44.5,46.5 50.5,46 53,44 56.5,44 50.5,50 55,49.5 28,53 51,55.5 50.5,58 50,53 75.5,57 76.25,71.12 108,52.5 110.5,42.5 117.5,45.5 98.25,47.75 109,65 103.5,63.5 131,51.6 131,55 113.75,58.25 119.5,63.5 25.4,12.7 25.4,82.55 139.7,82.55 139.7,12.7 76.5,49 116,51 113,51 110.5,61 110.5,59.5 110.5,58 110.5,56.5 110.5,55 112,61 113.5,61 115,61 116.5,61 116.5,59.5 116.5,58 116.5,56.5 117,55.5 115,55.5 113.5,55.5 112,55.5 118.5,52 27.5,61 24.5,48.5 18.5,39.5 18.5,28.5 19.5,68 32,70.5 41.5,71.5 31.5,26 40,28.5 37,44 37,63 42,56.5 45.5,74.5 56,76 53,59.5 62,68 49.5,80.5 59,87 63,83 67,78 67.5,72 70,56 70,47.5 78,59.5 84.5,57 87.5,52 78,77.5 72.5,81.5 75.5,90 69,94 78,94 86.5,91 91,86.5 93,81.5 92,78 91,73.5 99,90.5 107.5,90 110.5,83.5 107,77.5 114,89 113.5,78 107.5,70.5 98.5,75 100.5,67.5 120.5,69 124.5,68.5 124.5,75.5 120,75 122,83 127,91.5 135,74.5 135,70 137,66 142,65.5 142,49.5 142,44.5 110.5,36 128.5,36 142,36 123.5,46.5 105.5,52.5 98,36 99.5,29.5 92,28 84,49 86,45.5 82,44.5 85.5,29 92,23.5 76.5,42 74,32.5 83.5,32.5 60.5,37.5 60,25 61.5,20 54.5,33 52,35 47,27.5 35,32.5 8.5,39 9,28 45,16.5 57.5,16.5 66.5,9 93,9.5 86,20.5 92,18.5 58,8 45,7 103.5,8.5 129,24.5 112,24.5 112,9 73,75.5 83,77.5 73.5,87 99,84.5 121,58.5 126.75,55.25 126.5,63.5 133.5,54.75 127.5,50.5 22.5,54.5 22,59.5 28,45.5 33.5,40 68.75,33 89.25,32.75 71.25,9.75 88.5,10 71.5,18.25 79.5,12.25 72.25,22.5 47.5,58 43,61.5 54.5,53.5
  pour Top (isolate 0.25): 0,100 0,0 160,0 160,100
  pour Bottom: 0,0 0,100 160,100 160,-0.5
N$1  (via drill 0.5 pad 0.6)
  Top 0.22: 39,55.5 40,55.5 arc-90 41,54.5 41,53 | 39,55.5 U$2.81 35.5,55.5 34.5,57 34,58 32.58,58 arc-90 R10.2 | 41,53 41,52.5 arc-90 40,51.5 U$2.89 36,51.5 34.5,50 34.5,49 arc-90 34,48.5 28.5,48.5 R12.2 | U$2.85 38.5,53.5 arc90 39,54 39,55.5 | 41,53 v42,53
  Top 0.3: R12.2 L2.2 C8.1
  Top 0.406: R10.2 R11.2 C19.1
  Bottom 0.22: v42,53 C18.1
N$2  (via drill 0.5 pad 0.6)  (2 unrouted)
  Top 0.22: U$2.3 40,42.5 37,42.5 C1.1 | U$2.65 44,57 v45,57
  Top 0.406: PAD4.1 arc37 C1.1
  Bottom 0.22: 44.5,55 v45,57
  Bottom 0.406: v45,57 C9.+ PAD5.1
N$3
  Top 0.406: R6.1 Q1.1 37.5,36 | 37.5,36 C4.1 | R7.2 37.5,36
N$4
  Top 0.22: U$2.64 44.5,65 arc-90 45,65.5 U$1.183
N$5
  Top 0.22: U$2.5 41,42 R6.2
N$6
  Top 0.22: U$2.6 41.5,41.5 42,39 Q1.2
  Top 0.406: R7.1 C5.1 Q1.2
N$7
  Top 0.22: U$2.7 42,42 43.5,37.5 44.5,35 C6.1
  Top 0.406: C20.+ C6.1
N$8
  Top 0.22: U$2.10 43.5,40 44.5,37.5 R5.2
N$9
  Top 0.22: U$2.100 36.5,46 arc53 35.5,45.5 33.5,43.5 R4.2
N$10
  Top 0.22: U$2.99 36,46.5 arc53 34,45.5 R3.2
N$11
  Top 0.22: U$2.98 35.5,47 arc37 34,46.5 30,42.5 26.5,40.5 R2.2
N$12
  Top 0.22: U$2.87 36,52.5 R1.2
N$13
  Top 0.22: U$2.18 47.5,42.5 arc90 48,42 U$1.230
N$14
  Top 0.22: U$2.17 47,42 arc90 47.5,41.5 U$1.231
N$15
  Top 0.22: U$2.16 46.5,41.5 arc90 47,41 U$1.232
N$16
  Top 0.22: U$2.15 46,41 arc90 46.5,40.5 U$1.233
N$17
  Top 0.22: U$2.14 45.5,40.5 arc90 46,40 U$1.234
N$18
  Top 0.22: U$2.13 45,40 arc90 45.5,39.5 U$1.235
N$19
  Top 0.22: U$2.12 44.5,39.5 arc90 45,39 U$1.236
N$20
  Top 0.22: U$2.43 59.5,54.5 arc-90 60,54 arc90 60.5,53.5 U$1.207
N$21
  Top 0.22: U$2.44 60,55 arc-90 60.5,55.5 U$1.203
N$22
  Top 0.22: U$2.45 59.5,55.5 arc-90 60,56 U$1.202
N$23
  Top 0.22: U$2.46 59,56 arc-90 59.5,56.5 U$1.201
N$24
  Top 0.22: U$1.200 58.5,57 arc-90 58,56.5 55.5,56.5 54.5,57.5 U$2.49
N$25
  Top 0.22: U$1.197 53,58.5 53,58.25 arc-90 U$2.50
N$26
  Top 0.22: U$2.51 51,60.5 arc-90 51.5,61 54.5,61 55.5,59.5 56,59 U$1.196
N$27
  Top 0.22: U$2.52 50.5,61 arc-90 51,61.5 55,61.5 arc-90 55.5,61 57,59.5 U$1.195
N$28
  Top 0.22: U$2.53 50,61.5 arc-90 50.5,62 56,62 arc-90 56.5,61.5 arc90 58,60 U$1.194
N$29
  Top 0.22: U$2.56 48.5,62 arc-90 49,62.5 U$1.189
N$30
  Top 0.22: U$2.57 48,62.5 arc-90 48.5,63 U$1.188
N$31
  Top 0.22: U$2.58 47.5,63 arc-90 48,63.5 U$1.187
N$32
  Top 0.22: U$2.59 47,63.5 arc-90 47.5,64 U$1.186
N$33
  Top 0.22: U$2.62 45.5,64 arc-90 46,64.5 U$1.185
N$34
  Top 0.22: U$2.63 45,64.5 arc-90 45.5,65 U$1.184
N$35
  Top 0.25: U$9.19 69.72,81.78 arc90 69.5,82 69.92,82 arc90 R18.1
N$36
  Top 0.22: 40.5,59.5 U$2.72 40.5,61 42,62 44,65.5 44.5,66 U$1.182
N$37
  Top 0.22: U$2.76 37.5,58 37.5,61 41.5,62.5 44,66.5 U$1.181
N$38  (via drill 0.5 pad 0.6)
  Top 0.22: U$2.92 42.5,50 v44,51 | v59,50.5 60.5,49.5 arc14 61.5,49 U$1.216
  Bottom 0.22: v44,51 45.5,52 55,52 v59,50.5
N$39  (via drill 0.5 pad 0.6)
  Top 0.22: U$2.93 43.5,49.5 v46,51 | U$1.217 60.5,48.5 v59,49
  Bottom 0.22: v46,51 47.5,51 49,49.5 57,48 57.5,48 v59,49
N$40  (via drill 0.5 pad 0.6)
  Top 0.22: U$2.94 43.5,49 v47,50 | U$1.218 60.5,48 v59,47.5
  Bottom 0.22: v47,50 48,49 57.5,47 58,47 v59,47.5
N$41  (via drill 0.5 pad 0.6)
  Top 0.22: U$2.95 v47,48.5 | U$1.219 60.5,47.5 v59,46
  Bottom 0.22: v47,48.5 v59,46
N$42
  Top 0.406: R8.1 R9.1 arc-13 27.5,54.5 arc-26 20.5,52.5 U$3.RCT
  Bottom 0.406: U$3.RCT 9.3,52.2 C10.1
N$43
  Top 0.22: U$2.83 35.5,54.5 arc72 R8.2 33,51.5 27.5,51.5 C12.1
N$44
  Top 0.22: U$2.82 34.42,55 R9.2 31.5,57.5 28,58 C11.1
N$45
  Top 0.406: U$3.TCT 13,45 18,44 19.5,44 R12.1
  Bottom 0.813: C13.1 U$3.TCT
N$46  (via drill 0.5 pad 0.6)
  Top 0.22: U$2.78 36,57 arc-90 35.5,57.5 35.5,63 arc90 34.5,64 R11.1
  Top 0.406: v32.5,62 R11.1
  Bottom 0.406: U$3.TD- 17,52.5 21.5,52.5 v32.5,62
N$47  (via drill 0.5 pad 0.6)
  Top 0.22: U$2.79 36,56.5 arc-90 35,57.5 35,59 arc90 34,60 R10.1
  Top 0.406: R10.1 33.42,60.92 v34.5,62
  Bottom 0.406: v34.5,62 22.5,51 17.5,51 U$3.TD+
N$48
  Top 0.22: U$10.51 106.5,61 103.5,62 101.5,63 U$1.113
N$49  (1 unrouted)
  Top 0.22: U$1.150 79.5,71.5 80,72.75 80,75 80.5,76 81,77.38 U$8.28
  Top 0.3: 80.5,76 90,76.5 PAD26.1
  Top 0.406: PAD27.1 C45.2 | PAD26.1 arc94 U$7.P$3
N$50  (via drill 0.5 pad 0.5)
  Top 0.22: U$1.25 76.5,33.5 77.5,31.5 v79.5,29
  Top 0.3: U$5.5 72.39,16.26 73.15,19.3 77.72,20.32 77.73,20.8 arc-15 v79.5,29
  Top 0.406: 78.59,25.3 R14.1 | 78.59,25.3 78.49,25.4 | v79.5,29 78.59,25.3
N$51  (via drill 0.5 pad 0.5)
  Top 0.22: v75.5,29 U$1.23
  Top 0.3: U$5.1 80.01,15.24 arc-90 80.64,14.61 arc90 81.28,13.97 U$4.6
  Bottom 0.22: v75.5,29 arc90 74.72,28.22 U$13.A
  Bottom 0.3: U$13.A 74.72,23.95 C17.1 arc90 75.07,23.88 75.95,23.88 arc-90 77.47,22.35 U$5.1
N$52  (via drill 0.5 pad 0.5, 0.6)
  Top 0.22: U$1.24 76,33.5 v77.5,29
  Top 0.3: v77.5,29 arc90 77.22,28.72 76.72,21.07 70.61,19.81 arc90 69.85,19.05
  Top 0.406: U$5.7 69.85,19.05 | R17.1 95.25,7.62 arc-90 93.98,6.35 64.77,6.35 arc-90 63.5,7.62 v63.5,16.51
  Bottom 0.3: C14.1 79.22,23.95 U$12.A v77.5,29
  Bottom 0.406: U$5.7 69.85,16.51 arc90 68.58,17.78 64.77,17.78 arc90 v63.5,16.51
N$53  (via drill 0.5 pad 0.5)
  Top 0.22: U$1.14 71,33 70.5,31.5 v70.5,29
  Top 0.3: v70.5,29 69.22,27.72 U$14.A 69.22,24.23 arc90 C16.1 68.07,23.37 68.07,17.78 68.58,16.26 68.58,13.72 U$5.8
  Top 0.406: U$5.8 69.85,9.14 arc90 70.61,8.38 90.42,8.38 arc90 90.93,8.89 90.93,11.36 arc90 U$4.1
N$54  (via drill 0.5 pad 0.5)
  Top 0.22: U$1.12 70,33 v68.5,29
  Top 0.3: U$5.9 C15.1 | v82.55,15.24 U$4.5
  Top 0.406: C15.1 arc-90 64.97,25.48 U$15.A 67.72,28.22 arc90 v68.5,29
  Bottom 0.3: U$5.9 arc90 68.58,13.97 80.01,13.97 arc-90 81.28,15.24 v82.55,15.24
N$55
  Top 0.22: U$1.126 91.5,70.5 U$8.14
N$56  (1 unrouted)
  Top 0.22: U$1.153 78,70.5 78.25,71.75 PAD24.1
  Top 0.3: U$5.3 PAD25.1 R16.2
N$57  (via drill 0.5 pad 0.5)
  Top 0.22: U$1.17 72.5,32.5 v73.5,29
  Top 0.3: R15.1 v73.5,29
N$58
  Top 0.406: PAD1.1 R2.1
N$59
  Top 0.406: PAD2.1 R3.1
N$60
  Top 0.406: PAD3.1 R4.1
N$61  (via drill 0.5 pad 0.5)
  Top 0.22: v81.5,29 80,30.5 79,33.5 U$1.30
  Bottom 0.406: U$5.6 72.39,10.67 arc90 72.9,10.16 83.31,10.16 arc90 84.07,10.92 84.07,23.62 | 84.07,23.62 84.07,26.43 v81.5,29 | R13.2 84.1,23.65 84.07,23.62
N$62
  Top 0.22: U$1.127 91,70.12 89.75,71.88 88.88,72.38 U$8.13
N$63
  Top 0.22: U$1.128 90.5,69.88 89.38,71.38 88.38,72 arc-90 88.17,72.2 U$8.12
N$64
  Top 0.3: U$3.RD- 14.94,53.44 arc90 15,53.5 15.25,53.75 17,55.75 24.7,55.75 C11.2
N$65
  Top 0.3: U$3.RD+ 17.25,50.75 C12.2
N$66
  Top 0.22: U$8.11 87.62,71.88 arc90 87.88,71.62 88.62,71.12 89,70.75 U$1.131
N$67
  Top 0.22: U$1.132 88.5,70.25 arc53 88.25,70.75 arc16 87.12,71.38 arc-2 U$8.10
N$68
  Top 0.22: U$1.133 88,69.88 arc67 87.5,70.62 arc-26 86.62,71.25 86.25,72.12 U$8.9
N$69
  Top 0.22: U$1.134 87.5,69.88 86.75,70.5 86.12,70.88 85.62,72 U$8.8
N$70
  Top 0.22: U$1.135 87,69.62 85.62,70.5 85,72 U$8.7
N$71
  Top 0.22: U$1.142 83.5,70 84.25,72.25 U$8.6
N$72
  Top 0.22: U$1.143 83,70 83.62,72.25 U$8.5
N$73
  Top 0.22: U$1.144 82.5,70.12 82.88,71.88 U$8.4
N$74
  Top 0.22: U$1.145 82,70.25 82.25,71.62 U$8.3
N$75
  Top 0.22: U$1.146 81.5,70.38 81.62,71.5 U$8.2
N$76
  Top 0.22: U$1.147 81,71.25 U$8.1
N$77
  Top 0.22: U$1.171 U$9.1
N$78
  Top 0.22: U$1.169 70,70.25 69.75,71.75 U$9.2
N$79
  Top 0.22: U$1.168 70.5,70.75 70.38,71.75 U$9.3
N$80
  Top 0.22: U$1.167 U$9.4
N$81
  Top 0.22: U$1.159 U$9.10
N$82
  Top 0.22: U$1.160 74.5,70.88 74.38,71.75 U$9.9
N$83
  Top 0.22: U$1.161 74,70.5 73.62,71.38 U$9.8
N$84
  Top 0.22: U$1.162 73.5,70.12 73,71.25 U$9.7
N$85
  Top 0.22: U$1.164 72.5,70.62 72.38,71.88 U$9.6
N$86
  Top 0.22: U$1.166 71.5,70.62 71.62,71.88 U$9.5
N$87
  Top 0.406: U$4.2 95.25,12.7 R17.2
N$88
  Top 0.406: C39.1 R19.1 arc90 67.5,84.92 R18.2 R20.1
N$89
  Top 0.25: C40.1 88.88,81.38 arc29 88.25,80.62 U$8.17
  Top 0.3: C41.+ 87.75,88.62 arc-90 89.38,87 89.38,84.3 arc90 C40.1
  Top 0.406: R20.2 81.12,86.7 C41.+
N$90  (via drill 0.5)
  Top 0.305: v84.75,87 85.75,83.5 86,81.75 85.75,81 U$8.21
  Bottom 0.305: 84.21,89.49 T1-1T-KK81.P$3 | 84.21,89.49 R28.2 | v84.75,87 84.21,89.49
N$91
  Top 0.25: U$8.18 87.53,79.68 R21.2
N$93
  Top 0.25: U$10.35 116.5,68 arc90 116,68.5 102.5,68.5 arc90 102,68 102,67 arc-90 101.5,66.5 U$1.120
N$94  (1 unrouted)
  Top 0.22: U$1.91 99.75,52 arc90 PAD22.1
  Top 0.25: U$10.43 112.5,66 arc-90 PAD23.1
N$95
  Top 0.22: U$1.119 101,66 | 112,66.5 U$10.44
  Top 0.25: 112,66.5 112,67.5 arc90 111.5,68 103,68 arc90 102.5,67.5 102.5,66.5 arc-90 102,66 101,66
N$96
  Top 0.22: U$1.118 102,65.5 | 111.5,66 U$10.45
  Top 0.25: 111.5,66 111.5,67 arc90 111,67.5 103.5,67.5 arc90 103,67 103,66 arc-90 102.5,65.5 102,65.5
N$97
  Top 0.22: U$1.177 66,74.95 arc90 C55.1
  Top 0.406: C55.1 64.45,77.05 arc90 62.5,79 R33.2 61.92,80 arc90 R34.2
N$98
  Top 0.22: PAD33.1 U$1.4
N$99
  Top 0.22: U$1.57 92.5,32.5 arc-90 PAD34.1
N$100
  Top 0.22: U$1.46 87,33.5 arc-90 PAD35.1
N$101
  Top 0.406: PAD29.1 R34.1
N$102
  Top 0.22: U$1.117 103,65 | 111,65.5 U$10.46
  Top 0.25: 111,65.5 111,66.5 arc90 110.5,67 104,67 arc90 103.5,66.5 103.5,65.5 arc-90 103,65
N$103
  Top 0.22: U$1.88 98.5,50.5 99,50 LED6.1
N$104
  Top 0.406: LED6.2 R39.1
N$105
  Top 0.22: U$1.87 98,50 98.5,49.5 LED5.1
N$106
  Top 0.406: LED5.2 R38.1
N$107
  Top 0.22: U$1.78 LED4.1
N$108
  Top 0.25: U$10.47 110.5,66 arc90 110,66.5 104.5,66.5 arc90 104,66 104,65 arc-90 103.5,64.5 101.5,64.5 arc90 101,64 arc-90 100.5,63.5 U$1.114
N$109
  Top 0.22: U$1.112 101,62.5 106,60.5 U$10.52
N$110
  Top 0.22: U$1.111 100.5,62 105.5,60 U$10.53
N$111
  Top 0.22: U$1.110 100,61.5 105.5,59.5 U$10.54
N$112
  Top 0.22: U$1.109 100,61 105.5,59 U$10.55
N$113
  Top 0.22: U$1.108 100,60.5 105.5,58.5 U$10.56
N$114
  Top 0.22: U$10.60 103,56.5 100,58 U$1.103
N$115
  Top 0.22: U$1.100 101.5,56.5 102,56 U$10.61
N$116
  Top 0.22: U$10.31 120.5,61.5 arc90 121,62 121,65 arc169 R22.2
N$117  (via drill 0.5)
  Top 0.305: v84.75,82.25 85,80.5 U$8.22
  Bottom 0.305: 84.51,85.57 T1-1T-KK81.P$1 | 84.51,85.57 R28.1 | v84.75,82.25 84.51,85.57
N$118
  Top 0.22: U$1.99 101,56 101.5,55.5 U$10.62
N$119
  Top 0.406: ADT4-6T.P$3 U$22.1
N$120  (via drill 0.5)
  Top 0.25: U$11.3 130.68,58.23 arc90 v130.1,58.8
  Top 0.406: v130,67 C36.1 L4.1 C52.+
  Bottom 0.406: v130,67 128,67 arc90 127.5,66.5 127.5,61.5 v130.1,58.8 C53.1
N$121
  Top 0.406: U$7.P$1 C35.1 110.98,91.6 R29.1 110.98,87.94 arc90 R30.1
N$122
  Bottom 0.406: U$20.1 T1-1T-KK81.P$4
N$123  (via drill 0.5)
  Top 0.25: U$11.2 131.3,58.2 131.3,59.2 arc90 130.5,60 129.3,60 arc90 129.1,59.8 129.1,58.5 arc-90 v128.6,58 | U$10.17 119.4,53.6 v119.9,53
  Top 0.406: v119.9,53 C54.1
  Bottom 0.406: v119.9,53 v128.6,58
N$124
  Top 0.406: LED4.2 R37.1
N$125
  Top 0.406: LED3.2 R36.1
N$126
  Top 0.22: U$1.98 100.5,55.5 101,55 U$10.63
N$127
  Top 0.22: U$10.64 98.75,54.5 97.75,54 U$1.95
N$128
  Top 0.22: U$1.76 100.5,44.5 arc-69 LED3.1
N$129
  Top 0.22: U$10.30 121,61 arc90 121.5,61.5 C38.1
N$130
  Top 0.22: U$1.73 99.5,43 arc-90 100,42.5 100,41.5 arc90 100.5,41 LED2.1
N$131
  Top 0.22: U$10.29 121.5,60.5 C37.1
N$132
  Top 0.22: U$10.11 115,51 arc66 C46.1
N$133
  Top 0.22: U$10.10 114.5,49.5 arc-169 C45.1
N$134
  Top 0.22: U$10.19 120.5,55.5 121,54.5 C47.2
  Top 0.406: C49.1 125,53.5 R24.2 C47.2
N$135
  Top 0.25: R25.2 131.97,61.5 U$11.1
  Top 0.406: C50.2 R25.2 R27.1
N$136
  Top 0.25: U$11.4 127,57 R23.1 127.5,60 R25.1
  Top 0.406: R25.1 C50.1
N$137
  Top 0.22: U$10.20 120.5,56 C47.1
  Top 0.406: C47.1 R23.2 C48.1
N$138
  Top 0.25: R26.1 131.97,50.5 U$11.8
  Top 0.406: R31.2 C51.1 R26.1
N$139
  Top 0.25: R26.2 130.03,50.5 U$11.5 126.95,52.95 R24.1
  Top 0.406: C51.2 R26.2
N$140
  Top 0.406: R31.1 136,48 136,52.5 136.96,52.5 ADT4-6T.P$6
N$141
  Top 0.406: R27.2 136,61.5 136,57.5 136.96,57.5 ADT4-6T.P$4
N$142
  Top 0.406: LED2.2 R35.1
N$143
  Top 0.22: U$1.72 99,42.5 arc-90 99.5,42 99.5,39.5 arc90 100,39 LED1.1
N$144
  Top 0.406: LED1.2 R32.1
N$145
  Top 0.22: U$1.71 98.5,42 arc-90 99,41.5 99,39 arc90 99.5,38.5 arc-63 LED7.1
N$146
  Top 0.406: LED7.2 R40.1
N$147
  Top 0.22: U$1.70 98,41.5 arc-90 98.5,41 98.5,38.5 arc53 99,37.5 arc-7 LED8.1
N$148
  Top 0.406: LED8.2 R41.1
VCCD_PLL  (3 unrouted)
  Top 0.22: U$1.60 C32.1 | U$1.1 60.65,35 arc-90 C31.1 | U$1.121 96,68.5 arc90 PAD13.1 PAD12.1 | L1.1 64.5,69 64.5,68.75 U$1.180
  Top 0.3: C32.1 97.05,33.95 arc90 99,32 101,32 arc-90 PAD9.1 PAD8.1 | C31.1 60.49,35.51 arc90 59,37 PAD6.1 PAD7.1 | 64.5,68.75 C34.1
  Top 0.406: L1.1 PAD11.1 PAD10.1 C66.+
  Bottom 0.406: PAD12.1 C33.1

## Text on the board
Top: N2ADR